# EAGLE board Shield-1.0-Arduino (EAGLE 7.5.0)
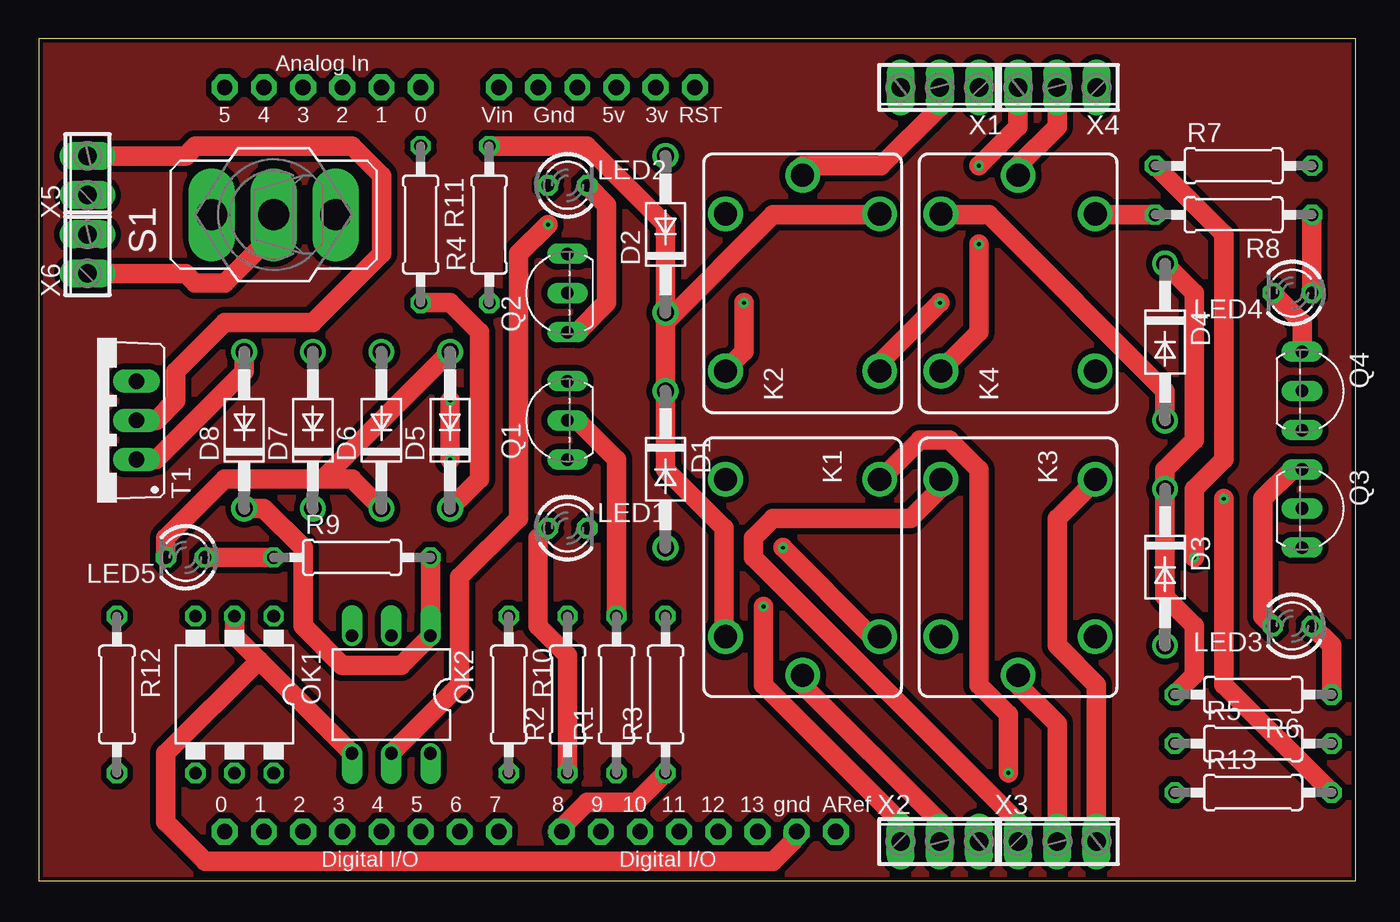
[diagram p0: board, top side]
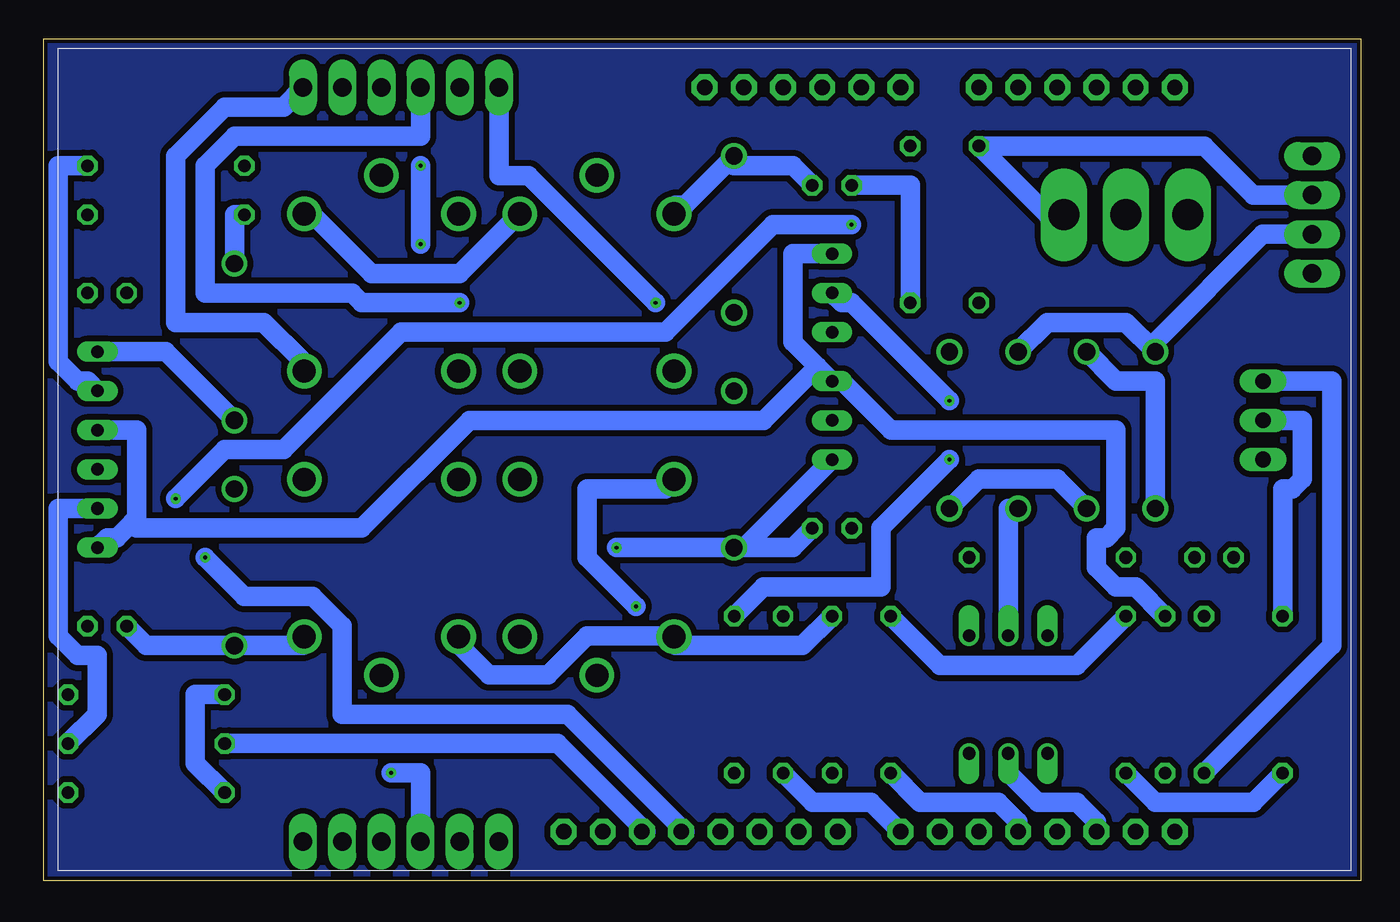
[diagram p1: board, bottom side, seen from below]

Size 85.39 x 54.6 mm. Coordinates in mm from the lower left corner, seen from the top.
Outline: 0,0 85.39,0 85.39,54.6 0,54.6 0,0
Copper layers (1*16): Top 0.035mm / dielectric 1.5mm / Bottom 0.035mm
Design rules "Rule1.0 *": minimum track width 50mil, minimum drill 10mil, track to track 15mil, track to pad 15mil, pad to pad 15mil, via to via 10mil, smd to smd 20mil, copper to edge 10mil, drill to drill 8mil, minimum pad ring 10mil, minimum via ring 8mil, stop-mask expansion 4mil, vias tented up to drill 0mil, thermal gap 10mil

## Footprints (pad centres in the part's own frame; a part is rotated, then mirrored left to right if it is on the bottom)
DO41-10 = drill 1.118: A 5.08,0; C -5.08,0
CQ1 = drill 1.5: 1 4.5,-5; 2 4.5,5; C 7,0; NC -5.7,-5; NO -5.7,5
LED3MM = drill 0.813 octagon: A -1.27,0; K 1.27,0
DIL06B = drill 0.813 octagon: 1 -2.54,-5.08; 2 0,-5.08; 3 2.54,-5.08; 4 2.54,5.08; 5 0,5.08; 6 -2.54,5.08
DIL06 = drill 0.813 offset: 1 -2.54,-3.81; 2 0,-3.81; 3 2.54,-3.81; 4 2.54,3.81; 5 0,3.81; 6 -2.54,3.81
TO92-EBC = drill 0.813 long: B 0,-1.27; C -2.54,-1.27; E 2.54,-1.27
0207/10 = drill 0.813 octagon: 1 -5.08,0; 2 5.08,0
320-916 = drill 2.007 long: 1 0,4.013; 2 0,0; 3 0,-4.013
TO220BV = drill 1.016 long: G 2.54,-2.54; T1 -2.54,-2.54; T2 0,-2.54
ARDUINO-NOHOLE = drill 1 pad 1.676 octagon: 3V 35.56,2.54; 5V 38.1,2.54; A0 50.8,2.54; A1 53.34,2.54; A2 55.88,2.54; A3 58.42,2.54; A4 60.96,2.54; A5 63.5,2.54; AREF 23.876,50.8; D0 63.5,50.8; D1 60.96,50.8; D2 58.42,50.8; D3 55.88,50.8; D4 53.34,50.8; D5 50.8,50.8; D6 48.26,50.8; D7 45.72,50.8; D8 41.656,50.8; D9 39.116,50.8; D10 36.576,50.8; D11 34.036,50.8; D12 31.496,50.8; D13 28.956,50.8; GND 26.416,50.8; GND1 43.18,2.54; GND2 40.64,2.54; RESET 33.02,2.54; VIN 45.72,2.54
3POL254 = drill 1.2 long: 1 -2.54,0; 2 0,0; 3 2.54,0
2POL254 = drill 1.2 long: 1 -1.27,0; 2 1.27,0

## Placement (x,y rotation side)
D1  1N4004  [DO41-10]  40.64,26.67 270 top
D2  1N4004  [DO41-10]  40.64,41.91 90 top
D3  1N4004  [DO41-10]  73.03,20.32 270 top
D4  1N4004  [DO41-10]  73.03,34.92 270 top
D5  1N4004  [DO41-10]  26.67,29.21 90 top
D6  1N4004  [DO41-10]  22.23,29.21 90 top
D7  1N4004  [DO41-10]  17.78,29.21 90 top
D8  1N4004  [DO41-10]  13.34,29.21 90 top
K1  5Vcc  [CQ1]  49.53,20.32 270 top
K2  5Vcc  [CQ1]  49.53,38.73 90 top
K3  5Vcc  [CQ1]  63.5,20.32 270 top
K4  5Vcc  [CQ1]  63.5,38.73 90 top
LED1  [LED3MM]  34.29,22.86 0 top
LED2  [LED3MM]  34.29,45.08 0 top
LED3  [LED3MM]  81.28,16.51 180 top
LED4  [LED3MM]  81.28,38.1 180 top
LED5  [LED3MM]  9.53,20.96 180 top
OK1  MOC3023  [DIL06B]  12.7,12.07 180 top
OK2  4N25M  [DIL06]  22.86,12.07 180 top
Q1  BC338  [TO92-EBC]  33.02,29.84 90 top
Q2  BC338  [TO92-EBC]  33.02,38.1 90 top
Q3  BC338  [TO92-EBC]  83.19,24.13 270 top
Q4  BC338  [TO92-EBC]  83.19,31.75 270 top
R1  1K  [0207/10]  37.47,12.07 90 top
R2  470R  [0207/10]  34.29,12.07 90 top
R3  1K  [0207/10]  40.64,12.07 90 top
R4  470R  [0207/10]  29.21,42.54 90 top
R5  1K  [0207/10]  78.74,8.89 0 top
R6  470R  [0207/10]  78.74,12.07 180 top
R7  1K  [0207/10]  77.47,46.35 0 top
R8  470R  [0207/10]  77.47,43.18 180 top
R9  470R  [0207/10]  20.32,20.96 0 top
R10  1K  [0207/10]  30.48,12.07 270 top
R11  1K  [0207/10]  24.77,42.54 270 top
R12  10K  [0207/10]  5.08,12.07 270 top
R13  1K  [0207/10]  78.74,5.71 0 top
S1  [320-916]  15.24,43.18 90 top
T1  BTA16  [TO220BV]  3.81,29.84 90 top
U$1  ARDUINO-NOHOLE  [ARDUINO-NOHOLE]  75.56,53.97 180 top
X1  [3POL254]  58.42,51.43 180 top
X2  [3POL254]  58.42,2.54 0 top
X3  [3POL254]  66.04,2.54 0 top
X4  [3POL254]  66.04,51.43 180 top
X5  [2POL254]  3.17,45.72 90 top
X6  [2POL254]  3.17,40.64 90 top

## Library data of the parts
D1-D8 = diode
K1-K4 = relay; OC_FARNELL: unknown; OC_NEWARK: unknown
LED1-LED5 = led
OK1 = optocoupler; OC_FARNELL: unknown; OC_NEWARK: unknown
OK2 = optocoupler; MPN: 4N25-M; OC_FARNELL: 1021349; OC_NEWARK: 98K9084
Q1-Q4 = transistor-npn
R1-R13 = rcl
S1 = switch
T1 = triac
U$1 = GH
X1-X6 = con-phoenix-254; OC_FARNELL: unknown; OC_NEWARK: unknown

## Nets
3V: U$1.3V
5V: U$1.5V
GND: OK1.2 OK2.4 Q1.E Q2.E Q3.E Q4.E U$1.GND
GND1: U$1.GND1
GND2: U$1.GND2
N$1: K2.C X1.2
N$2: K2.NC X1.1
N$3: K1.C X2.2
N$4: K1.NC X2.1
N$5: K1.NO X2.3
N$6: K2.NO X1.3
N$7: Q2.B R3.2
N$8: LED2.A R4.1
N$9: D2.A K2.2 LED2.K Q2.C
N$10: K3.C X3.2
N$11: K3.NC X3.1
N$12: K3.NO X3.3
N$13: Q1.B R1.2
N$14: LED1.A R2.1
N$15: Q3.B R5.2
N$16: D1.A K1.2 LED1.K Q1.C
N$17: LED3.A R6.1
N$18: D3.A K3.2 LED3.K Q3.C
N$19: K4.C X4.2
N$20: K4.NC X4.1
N$21: K4.NO X4.3
N$22: Q4.B R7.2
N$23: LED4.A R8.1
N$24: D4.A K4.2 LED4.K Q4.C
N$25: R1.1 U$1.D7
N$26: OK1.1 R10.1
N$27: R3.1 U$1.D8
N$28: R5.1 U$1.D13
N$29: R7.1 U$1.D12
N$30: OK1.6 R12.2
N$31: LED5.A R9.1
N$32: D6.A D8.A T1.T1 X6.2
N$33: S1.2 X6.1
N$34: OK1.4 T1.G
N$35: R11.1 S1.3 X5.1
N$36: D5.C D7.C R11.2
N$38: D5.A D6.C LED5.K OK2.2
N$39: OK2.5 R13.2 U$1.D2
N$40: R10.2 U$1.D4
N$41: R12.1 T1.T2 X5.2
VCC: D1.C D2.C D3.C D4.C K1.1 K2.1 K3.1 K4.1 R2.2 R4.2 R6.2 R8.2 R13.1
VCC1: D7.A D8.C OK2.1 R9.2
VIN: U$1.VIN

## Tracks (layer width: path | path; a pad name or v marks a point on that pad's centre or on a via)
GND
  Top 1.27: OK1.2 12.7,15.88 14.29,14.29 | OK2.4 14.29,14.29 | 14.29,14.29 8.25,8.26 8.25,3.81 10.8,1.27 47.62,1.27 48.9,2.54 48.9,3.18 U$1.GND
  Bottom 1.27: Q3.E 81.28,22.23 80.64,22.23 79.69,23.18 | 79.69,23.18 79.38,23.5 79.38,29.21 Q4.E | 35.24,33.34 36.83,34.92 36.83,40.64 Q2.E | 35.24,33.34 Q1.E 33.66,32.38 30.48,29.21 15.88,29.21 15.88,22.86 16.51,22.23 17.14,22.23 17.14,20.32 15.88,19.05 14.61,19.05 OK1.2 | 35.24,33.34 38.73,29.84 57.78,29.84 64.77,22.86 79.38,22.86 79.69,23.18
N$1
  Top 1.27: X1.2 58.42,50.16 54.61,46.35 49.53,46.35 K2.C
N$2  (via drill 0.25)
  Top 1.27: v58.42,37.46 54.61,33.65 K2.NC
  Bottom 1.27: X1.1 60.96,48.26 73.03,48.26 74.93,46.35 74.93,38.1 65.41,38.1 64.77,37.46 v58.42,37.46
N$3
  Top 1.27: X2.2 58.42,3.81 49.53,12.7 K1.C
N$4  (via drill 0.25)
  Top 1.27: X2.1 55.88,3.81 46.99,12.7 v46.99,17.78
  Bottom 1.27: v46.99,17.78 50.16,20.96 50.16,25.4 45.09,25.4 K1.NC
N$5  (via drill 0.25)
  Top 1.27: v62.86,6.99 62.86,10.79 60.96,12.7 60.96,26.67 59.06,28.57 57.15,28.57 54.61,26.04 K1.NO
  Bottom 1.27: X2.3 60.96,6.99 v62.86,6.99
N$6  (via drill 0.25)
  Top 1.27: v45.72,37.46 45.72,34.29 45.09,33.65 K2.NO
  Bottom 1.27: X1.3 55.88,45.72 53.98,45.72 v45.72,37.46
N$7  (via drill 0.25)
  Top 1.27: v26.67,27.3 v26.67,31.11
  Bottom 1.27: Q2.B 33.66,37.46 33.02,37.46 v26.67,31.11 | v26.67,27.3 31.12,22.86 31.12,19.05 38.73,19.05 R3.2
N$8
  Bottom 1.27: R4.1 29.21,45.08 LED2.A
N$9
  Top 1.27: Q2.C 34.92,35.56 36.83,37.46 36.83,43.81 LED2.K
  Bottom 1.27: K2.2 44.45,43.81 43.81,43.81 D2.A 40.64,46.35 36.83,46.35 LED2.K
N$10
  Top 1.27: X3.2 66.04,10.16 63.5,12.7 K3.C
N$11
  Top 1.27: X3.1 63.5,3.81 46.36,20.96 46.36,22.23 47.62,23.5 56.52,23.5 58.42,25.4 K3.NC
N$12
  Top 1.27: X3.3 68.58,12.7 66.04,15.24 66.04,23.5 67.95,25.4 K3.NO
N$13
  Top 1.27: R1.2 37.47,27.3 34.92,29.84 Q1.B
N$14
  Top 1.27: R2.1 34.29,14.61 32.38,16.51 32.38,22.23 LED1.A
N$15
  Bottom 1.27: R5.2 81.92,10.79 81.92,14.61 83.19,14.61 84.45,15.88 84.45,24.13 Q3.B
N$16  (via drill 0.25)
  Top 1.27: v48.26,21.59 53.98,15.88 K1.2
  Bottom 1.27: LED1.K 36.83,21.59 40.01,21.59 | 40.01,21.59 Q1.C | 40.01,21.59 D1.A v48.26,21.59
N$17
  Top 1.27: R6.1 83.82,15.24 LED3.A
N$18
  Top 1.27: Q3.C 81.28,26.67 79.38,24.77 79.38,17.14 LED3.K
  Bottom 1.27: LED3.K 78.74,15.24 D3.A 68.58,15.24 K3.2
N$19
  Top 1.27: X4.2 66.04,48.89 63.5,46.35 K4.C
N$20
  Bottom 1.27: X4.1 69.85,50.16 73.66,50.16 76.83,46.99 76.83,36.2 71.12,36.2 68.58,33.65 K4.NC
N$21  (via drill 0.25)
  Top 1.27: X4.3 63.5,48.89 v60.96,46.35 | v60.96,41.27 60.96,35.56 59.06,33.65 K4.NO
  Bottom 1.27: v60.96,41.27 v60.96,46.35
N$22
  Bottom 1.27: Q4.B 82.55,32.38 83.19,32.38 84.45,33.65 84.45,46.35 R7.2
N$23
  Top 1.27: R8.1 LED4.A
N$24
  Top 1.27: Q4.C 81.92,36.2 LED4.K | D4.A 73.03,31.75 61.59,43.18 59.06,43.18 K4.2
  Bottom 1.27: D4.A 77.47,34.29 Q4.C
N$25
  Bottom 1.27: R1.1 35.56,5.08 31.75,5.08 U$1.D7
N$26
  Bottom 1.27: OK1.1 18.41,13.97 27.3,13.97 R10.1
N$27
  Top 1.27: R3.1 38.73,5.08 35.56,5.08 33.66,3.18 U$1.D8
N$28
  Bottom 1.27: R5.1 52.07,8.89 46.36,3.18 U$1.D13
N$29  (via drill 0.25)
  Top 1.27: R7.1 76.83,41.91 76.83,27.3 74.93,25.4 v74.93,20.96
  Bottom 1.27: v74.93,20.96 72.39,18.41 67.95,18.41 66.04,16.51 66.04,10.79 51.44,10.79 43.81,3.18 U$1.D12
N$30
  Bottom 1.27: R12.2 6.99,5.08 13.34,5.08 OK1.6
N$31
  Top 1.27: R9.1 LED5.A
N$32
  Top 1.27: T1.T1 7.62,27.3 13.34,33.02 D8.A
  Bottom 1.27: D6.A 20.32,36.2 15.24,36.2 D8.A 13.34,34.92 6.35,41.91 X6.2
N$33
  Top 1.27: X6.1 9.53,39.37 10.16,38.73 12.07,38.73 15.24,41.91 S1.2
N$34
  Bottom 1.27: OK1.4 1.91,15.24 1.91,32.38 T1.G
N$35
  Bottom 1.27: S1.3 20.32,43.18 R11.1 10.16,47.62 6.99,44.45 X5.1
N$36
  Top 1.27: R11.2 26.67,37.46 28.58,35.56 28.58,26.04 D5.C
  Bottom 1.27: D7.C 19.69,26.04 24.77,26.04 D5.C
N$37
  pour Bottom: 0,54.61 85.72,54.61 85.72,0 0,0
N$38
  Top 1.27: LED5.K 8.25,22.23 12.07,26.04 18.41,26.04 | 18.41,26.04 20.32,26.04 D6.C | 18.41,26.04 D5.A
  Bottom 1.27: OK2.2 22.86,24.13 D6.C
N$39  (via drill 0.25)
  Top 1.27: R13.2 76.83,12.7 v76.83,24.77 | v33.02,42.54 31.12,40.64 31.12,23.5 27.3,19.68 27.3,12.7 OK2.5
  Bottom 1.27: OK2.5 22.86,6.99 20.96,5.08 18.41,5.08 17.14,3.81 U$1.D2 | v76.83,24.77 73.66,27.94 69.85,27.94 62.23,35.56 45.09,35.56 38.1,42.54 v33.02,42.54
N$40
  Bottom 1.27: R10.2 28.58,5.08 23.5,5.08 22.23,3.81 U$1.D4
N$41
  Top 1.27: X5.2 9.53,46.99 10.16,47.62 20.32,47.62 22.23,45.72 22.23,40.64 17.78,36.2 12.07,36.2 8.89,33.02 8.89,31.11 7.62,29.84 T1.T2
  Bottom 1.27: R12.1 5.08,25.4 4.44,25.4 3.81,26.04 3.81,29.84 T1.T2
N$42
  pour Top: 0,54.61 85.72,54.61 85.72,0 0,0
VCC
  Top 1.27: R6.2 74.93,13.34 74.93,16.51 73.03,18.41 D3.C 73.03,26.67 74.93,28.57 74.93,38.1 D4.C | R8.2 68.58,43.18 K4.1 | R4.2 35.56,47.62 40.64,42.54 D2.C 40.64,36.2 | 40.64,36.2 D1.C 40.64,26.67 44.45,22.86 44.45,15.88 K1.1 | 40.64,36.2 47.62,43.18 53.98,43.18 K2.1
  Bottom 1.27: R2.2 36.2,15.24 44.45,15.24 K1.1 45.09,15.88 50.16,15.88 52.7,13.34 56.52,13.34 58.42,15.24 K3.1 | R13.1 75.56,7.62 75.56,12.07 R6.2 | D4.C 73.03,43.18 R8.2 | K4.1 67.95,43.18 64.14,39.37 58.42,39.37 54.61,43.18 K2.1
VCC1
  Top 1.27: R9.2 OK2.1 23.5,13.97 19.69,13.97 17.14,16.51 17.14,21.59 14.61,24.13 D8.C
  Bottom 1.27: D8.C 13.34,32.38 15.88,32.38 D7.A